# Altium PCB JLX12864.PcbDoc
Units mm, origin at the board's own origin, x right, y up, seen from the top; angles counter-clockwise.
Board outline 44 x 40 mm, 4 copper layers (Top Layer, Internal Plane 1, Internal Plane 2, Bottom Layer); 6 components, 13 nets, 33 pads, 0 vias.
Unrouted connection lines stored in the file: 2.
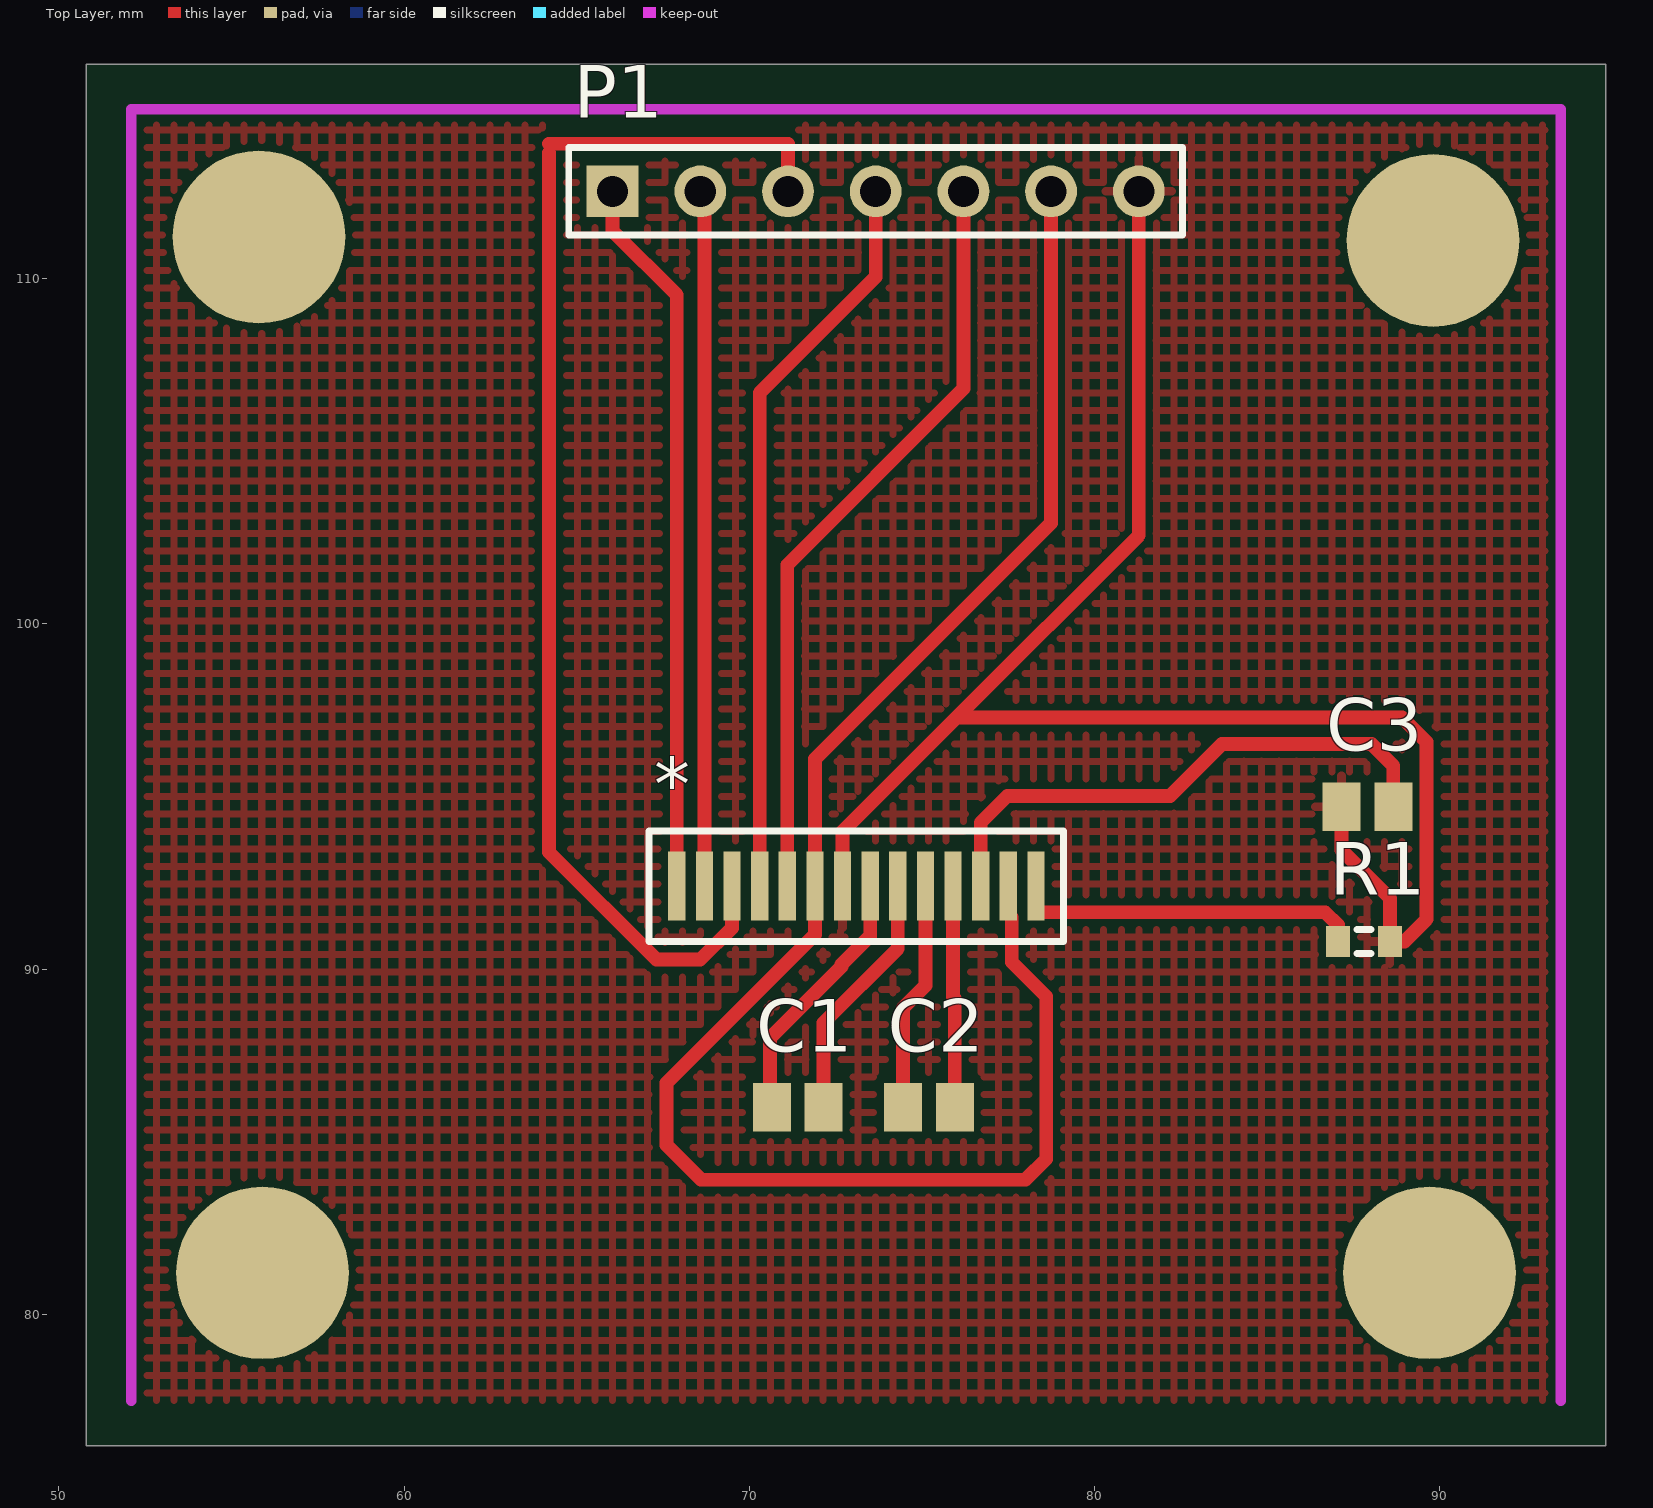
[diagram p0: Top Layer view]
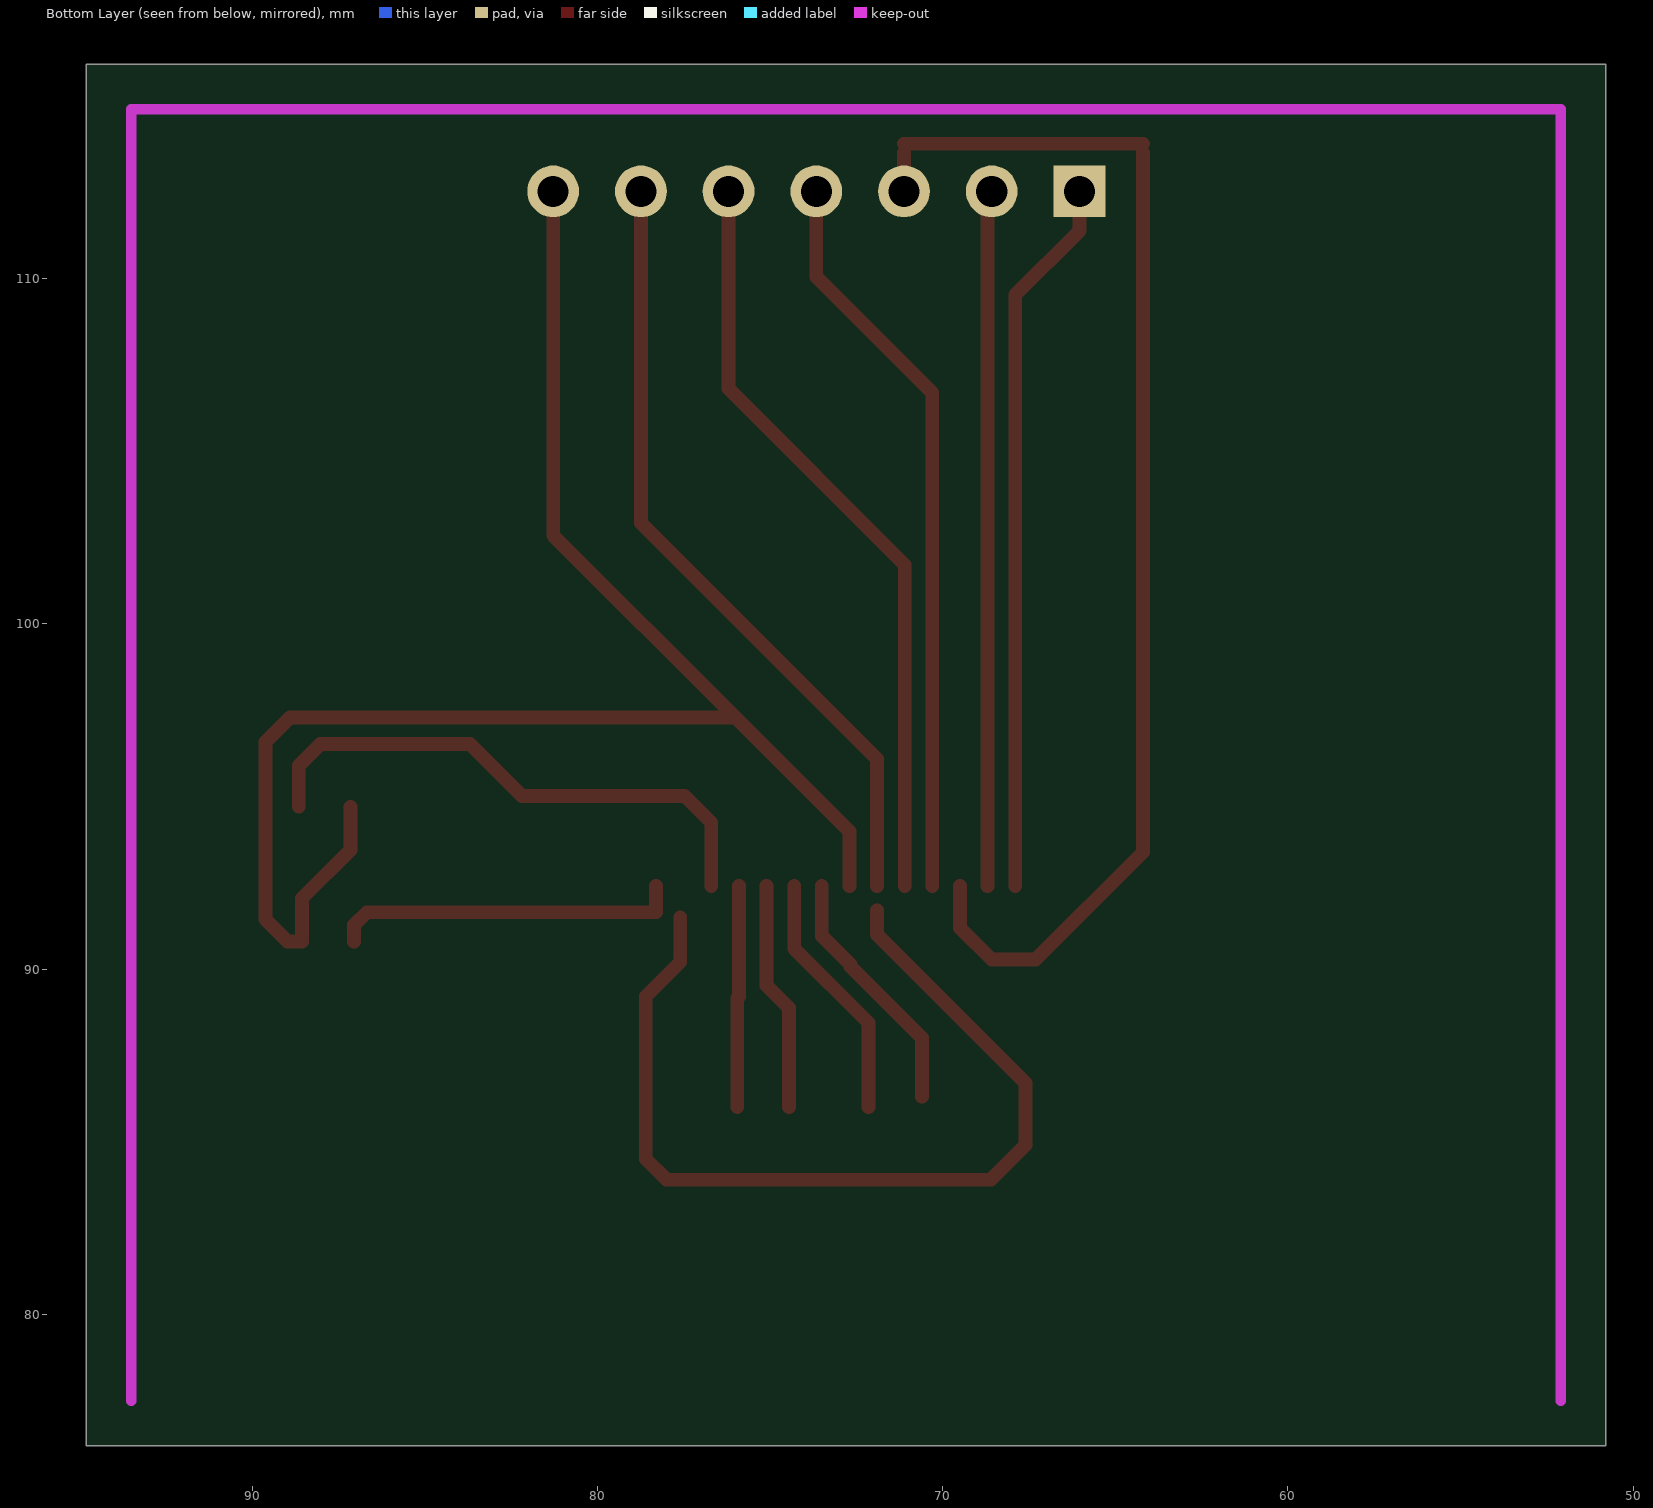
[diagram p1: Bottom Layer view, seen from below]
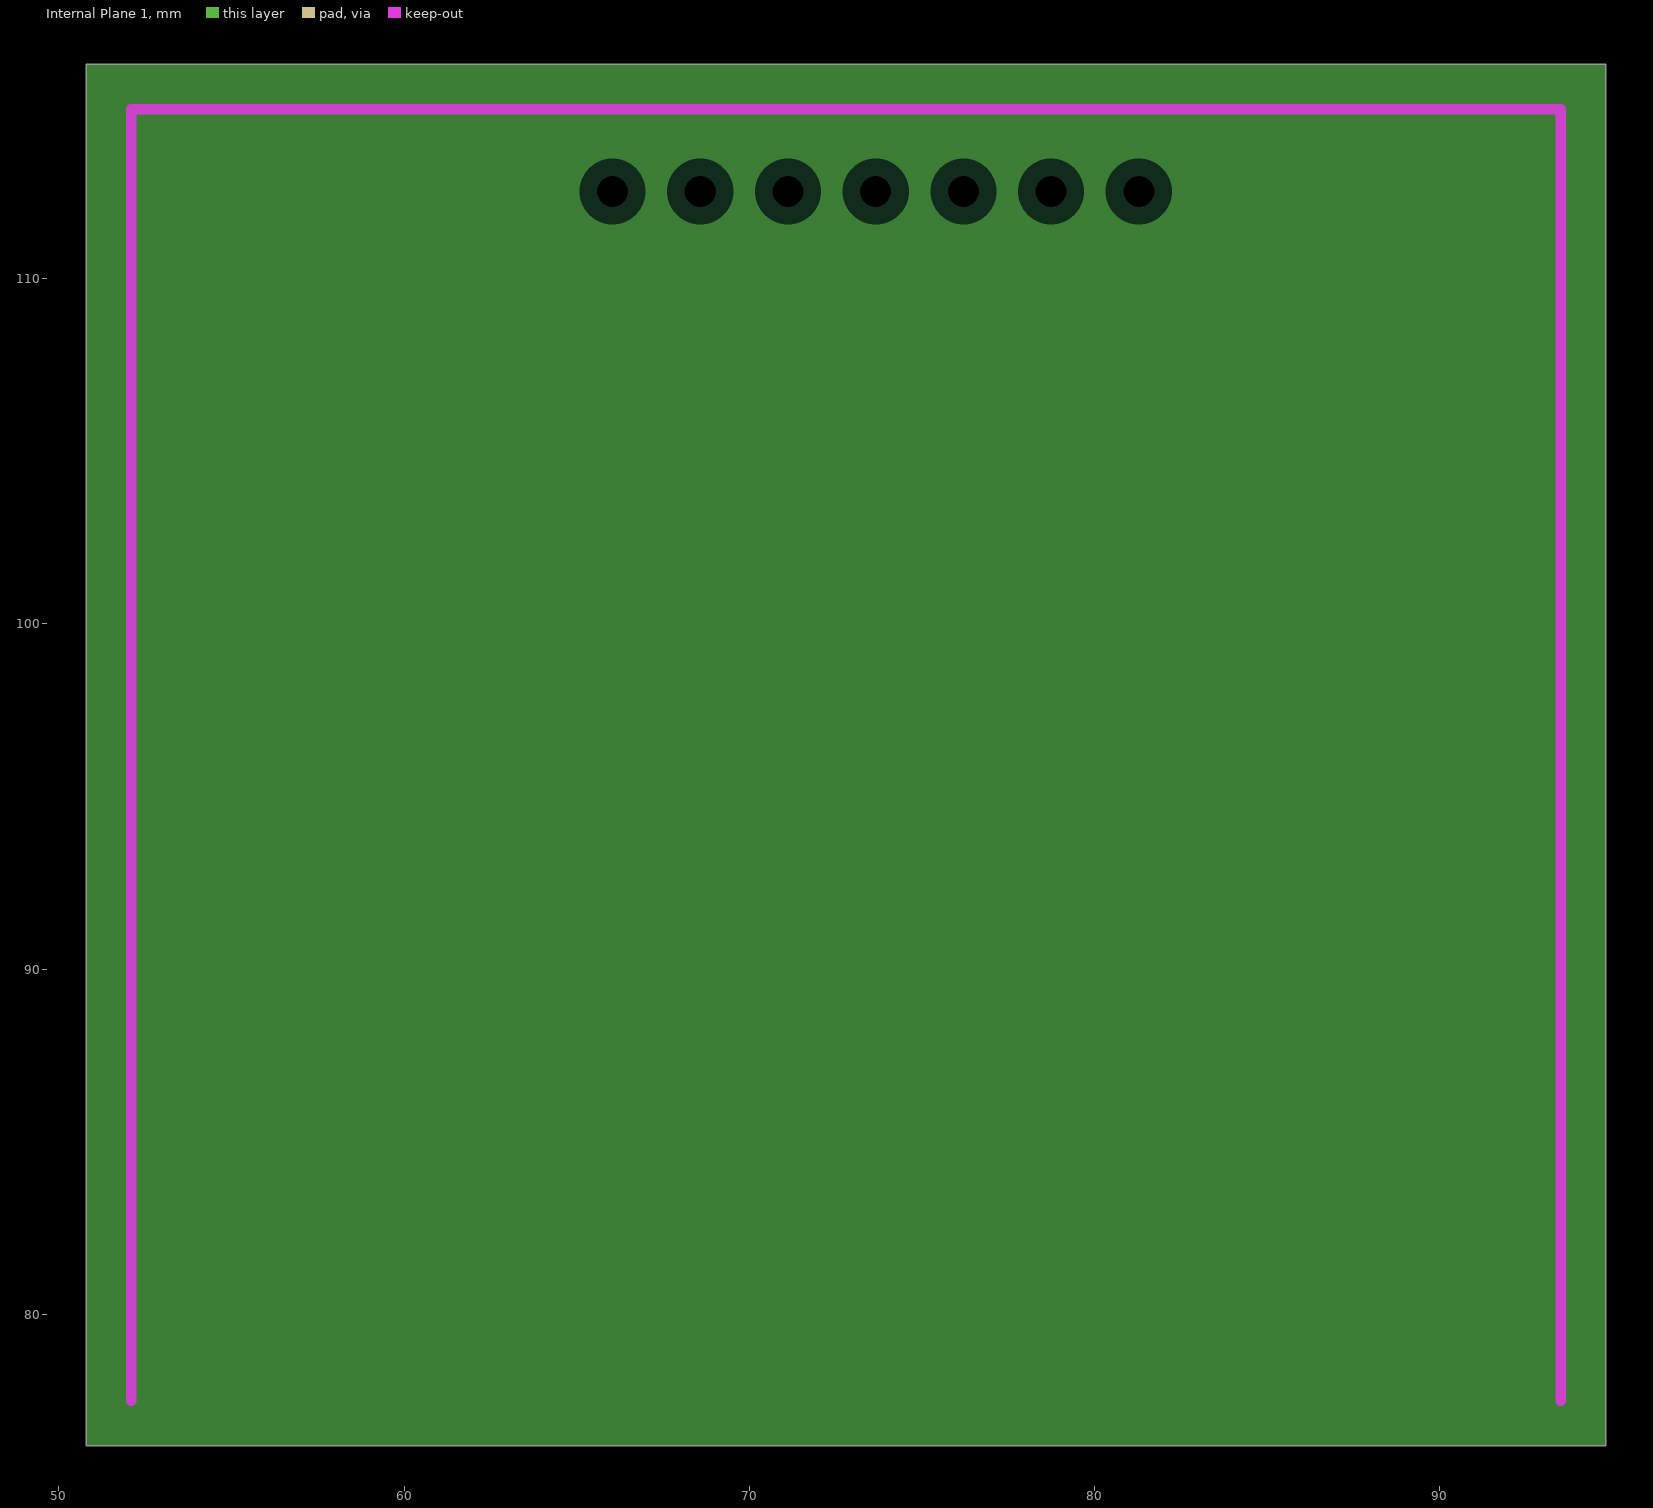
[diagram p2: Internal Plane 1, clearances drawn from the general rule]
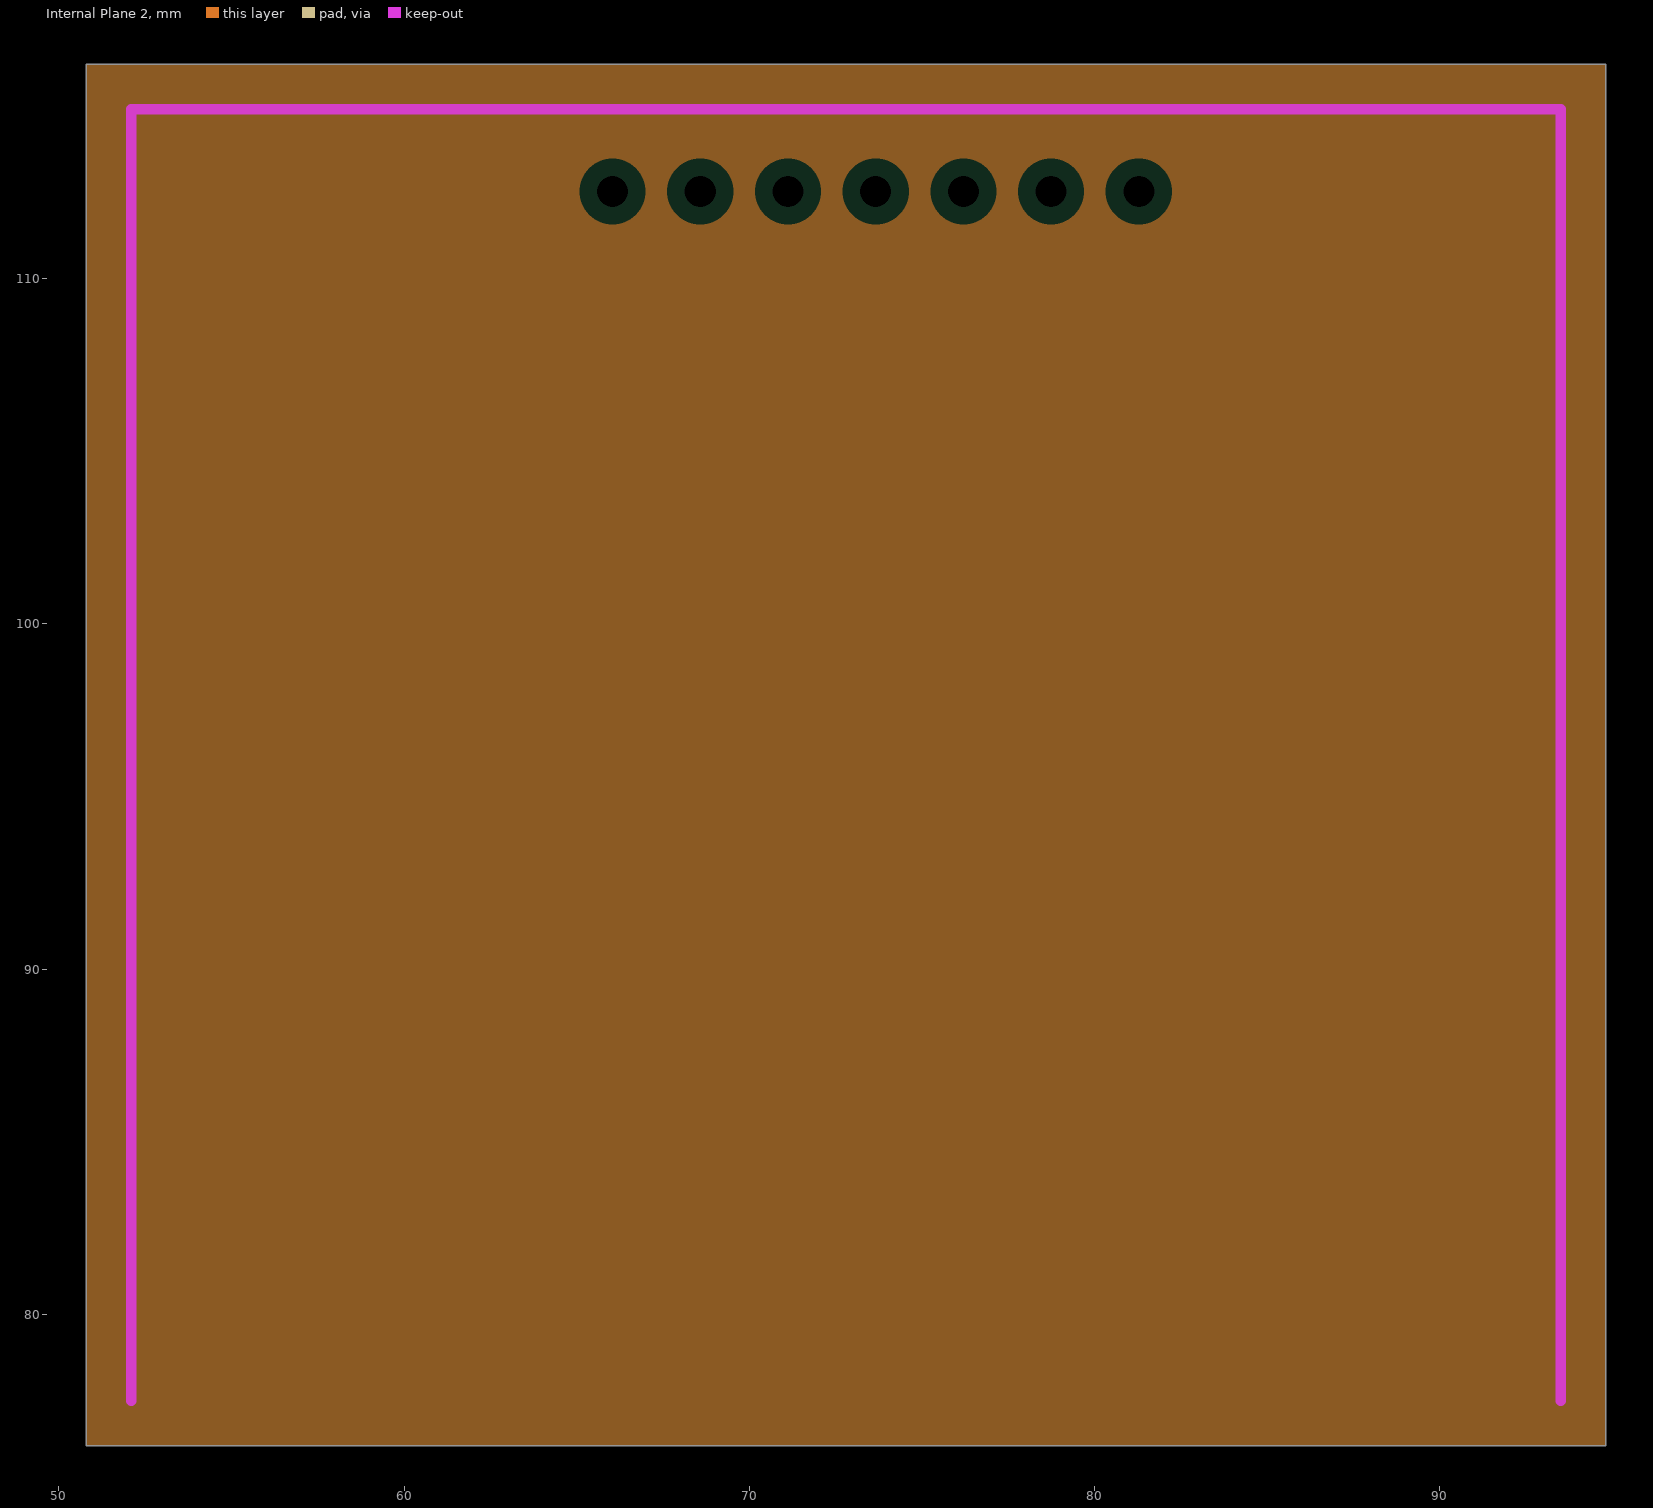
[diagram p3: Internal Plane 2, clearances drawn from the general rule]

## Layer stack, top to bottom
Top Layer: signal copper 0.0356
Dielectric: dielectric 0.32, FR-4, Dk 4.8
Internal Plane 1: plane copper 0.0356
Dielectric: dielectric 0.32, FR-4, Dk 4.8
Internal Plane 2: plane copper 0.0356
Dielectric: dielectric 0.32, FR-4, Dk 4.8
Bottom Layer: signal copper 0.0356

## Board outline
50.8,76.2 94.8,76.2 94.8,116.2 50.8,116.2

## Design rules (kind name [scope] priority, off if disabled: settings)
Clearance [All] p1: gap=0.2
PlaneClearance [All] p1: clearance=0.508
PlaneConnect [All] p1: planeconnectstyle=Relief reliefexpansion=0.508 reliefentries=4 reliefconductorwidth=0.254 reliefairgap=0.254
PolygonConnect [All] p1: connectstyle=Relief reliefconductorwidth=0.254 reliefentries=4 polygonreliefangle="90 Angle"
RoutingVias [All] p1: holewidth=0.6 width=1 viastyle="Through Hole" minholewidth=0.711 minwidth=1.27 maxholewidth=0.711 maxwidth=1.27
SilkscreenOverComponentPads [All] p1: minsilkscreentomaskgap=0.254
SolderMaskExpansion [All] p1: expansion=0.102
Width [All] p1: maxlimit=2 minlimit=0.35 preferedwidth=0.4
25 further rules are at their usual default settings.

## Components (designator, comment, footprint, x,y, rotation, side; value= is the part's Value field where it differs from the comment)
* "Component_1" PCBComponent_1 75.1,113.2 r0 top
C1 "Cap Pol3" C0805 71.4,86 r180 top
C2 "Cap Pol3" C0805 75.2,86 r180 top
C3 "Cap Pol3" C0805 87.9,94.7 r0 top
P1 "Header 7" HDR1X7 66.04,112.522 r0 top
R1 "Res3" J1-0603 87.8,90.8 r180 top

## Footprints (in the part's own frame and the unit in brackets; to place one, negate y for a bottom-side part, rotate by r counter-clockwise, add the part's x,y. Pads: shape width x height; smd on the part's side, far side on the other; paste and mask are expansions set on the pad)
C0805 [mm] "Chip Capacitor, Body 2.0x1.3mm, IPC High Density"
  rect 1.1x1.4 smd: 1(-0.75,0) 2(0.75,0)
  body extent -1.1,-0.72 1.1,0.72, height 1.4
HDR1X7 [mm] "Connector; Header; 7 Position"
  rect 1.5x1.5 hole 0.9: 1(0,0)
  round 1.5 hole 0.9: 2(2.54,0) 3(5.08,0) 4(7.62,0) 5(10.16,0) 6(12.7,0) 7(15.24,0)
  silkscreen extent -1.27,-1.27 16.51,1.27
J1-0603 [mm] "Chip Resistor, Body 1.6x0.8mm, IPC High Density"
  rect 0.7x0.9 smd: 1(-0.75,0) 2(0.75,0)
  silkscreen extent -0.2,-0.35 0.2,0.35, body extent -0.85,-0.48 0.85,0.48, height 0.9
PCBComponent_1 [mm]
  rect 0.5x2 smd: 1(-7.2,-20.8) 2(-6.4,-20.8) 3(-5.6,-20.8) 4(-4.8,-20.8) 5(-4,-20.8) 6(-3.2,-20.8) 7(-2.4,-20.8) 8(-1.6,-20.8) 9(-0.8,-20.8) 10(0,-20.8) 11(0.8,-20.8) 12(1.6,-20.8) 13(2.4,-20.8) 14(3.2,-20.8)
  silkscreen extent -8,-22.4 4,-19.2

## Part data
C1 C2 C3: "Polarized Capacitor (Surface Mount)"
P1: "Header, 7-Pin"
R1: "Resistor"

## Free pads (board coordinates)
  round 5 smd: 0(55.8,111.2) 1(89.8,111.1) 2(89.7,81.2) 3(55.9,81.2)

## Nets (pads, with @x,y where several pads share a name; then routed paths per layer and width w, separated by ;. In a path a pad name is that pad's centre, name@x,y a point inside that pad or via, vN(x,y) a via of type N, cw(c..) or ccw(c..) an arc to the next point about the centre after c; other vN are vias at no path point)
CD: *.3 P1.3 | length 36.5
  Top Layer w0.4: 64.2,113.637 64.2,93.382 67.31,90.272 68.58,90.272 69.5,91.192 *.3 ; 64.2,113.9 71.12,113.9 ; P1.3 71.12,113.637
CS0: *.1 P1.1 | length 20.9
  Top Layer w0.4: P1.1 66.04,111.379 67.9,109.519 *.1
GND: *.7 C3.1 P1.7 R1.1 | length 48.5
  Top Layer w0.4: *.7 72.7,93.98 76.002,97.282 ; P1.7 81.28,102.56 76.002,97.282 ; C3.1 87.15,93.45 88.55,92.05 R1.1 88.971,90.8 89.611,91.44 89.611,96.571 88.9,97.282 76.002,97.282
Net*_8: *.8 C1.2 | length 2.6
  Top Layer w0.4: 72.671,90.129 73.5,90.957 *.8
Net*_9: *.9 C1.1 | length 7.3
  Top Layer w0.4: C1.1 72.15,88.444 74.3,90.594 *.9
Net*_10: *.10 C2.2 | length 6.7
  Top Layer w0.4: C2.2 74.45,88.875 75.1,89.525 *.10
Net*_11: *.11 C2.1 | length 6.4
  Top Layer w0.4: *.11 75.9,89.204 75.95,89.154 C2.1
Net*_12: *.12 C3.2 | length 16.2
  Top Layer w0.4: *.12 76.7,94.237 77.47,95.007 82.18,95.007 83.693,96.52 88.015,96.52 88.65,95.885 C3.2
Net*_14: *.14 R1.2 | length 10.1
  Top Layer w0.4: *.14 78.3,91.643 86.677,91.643 87.05,91.271 R1.2
RST: *.2 P1.2 | length 20.2
  Top Layer w0.4: P1.2 68.7,112.402 *.2
SCK: *.4 P1.4 | length 21.5
  Top Layer w0.4: *.4 70.3,106.68 73.66,110.04 P1.4
SDA: *.5 P1.5 | length 22.2
  Top Layer w0.4: *.5 71.1,101.707 76.2,106.807 P1.5
VCC: *.6 *.13 P1.6 | length 23
  Top Layer w0.4: *.6 71.9,96.081 78.74,102.921 P1.6
copper on no net: | length 32.3
  Top Layer w0.4: 70.6,86.3 70.6,88 72.671,90.071 72.671,90.129 ; 71.9,91.7 71.9,91 67.6,86.7 67.6,84.9 68.6,83.9 78,83.9 78.6,84.5 78.6,89.2 77.6,90.2 77.6,91.5

## Polygon pours and split planes (outlines as drawn)
GND on Top Layer "Top Layer-No Net" (hatched 90Degree grid 0.508 track 0.203, pour order 8): 52.1,77.5 93.5,77.5 93.4,77.6 93.4,114.7 93.4,114.8 93.5,114.9 52.1,114.9
no net on Internal Plane 1 (split plane): 94.8,76.2 50.8,76.2 50.8,116.2 94.8,116.2
no net on Internal Plane 2 (split plane): 94.8,76.2 50.8,76.2 50.8,116.2 94.8,116.2

## Keep-outs
Keep-Out Layer:
  lines w0.3: 52.1,77.5 52.1,114.9 93.5,114.9 93.5,77.5

## Silkscreen, mask and mechanical layers (free items; w line width, h text height)
Mechanical 1:
  lines w0.2: 52.1,77.5 66.3,77.5 66.5,77.7 66.5,80 66.7,80.2 79.3,80.2 79.5,80 79.5,77.6 79.5,77.5 ; 93.4,77.5 93.5,77.5 79.5,77.5 ; 93.5,114.8 93.5,114.9 ; 79.5,77.5 79.5,77.5 ; 79.5,77.5 79.5,77.5 ; 93.5,114.9 93.5,114.9 ; 52.1,114.9 52.1,114.9

## Dimensions
52.1,77.5 to 52.1,114.9 on Mechanical 1